# Altium PCB MCH_CLKB_PCB.PcbDoc (part 4 of 5)
Units mil, origin at the board's own origin, x right, y up, seen from the top; angles counter-clockwise.
Board outline 7110.67 x 2894.12 mil, 6 copper layers (Top Layer, GND, MidLayer1, MidLayer2, InternalPlane1, Bottom Layer), stack 61.549 mil thick; 421 components, 433 nets, 2112 pads, 1311 vias.
Unrouted connection lines stored in the file: 39.
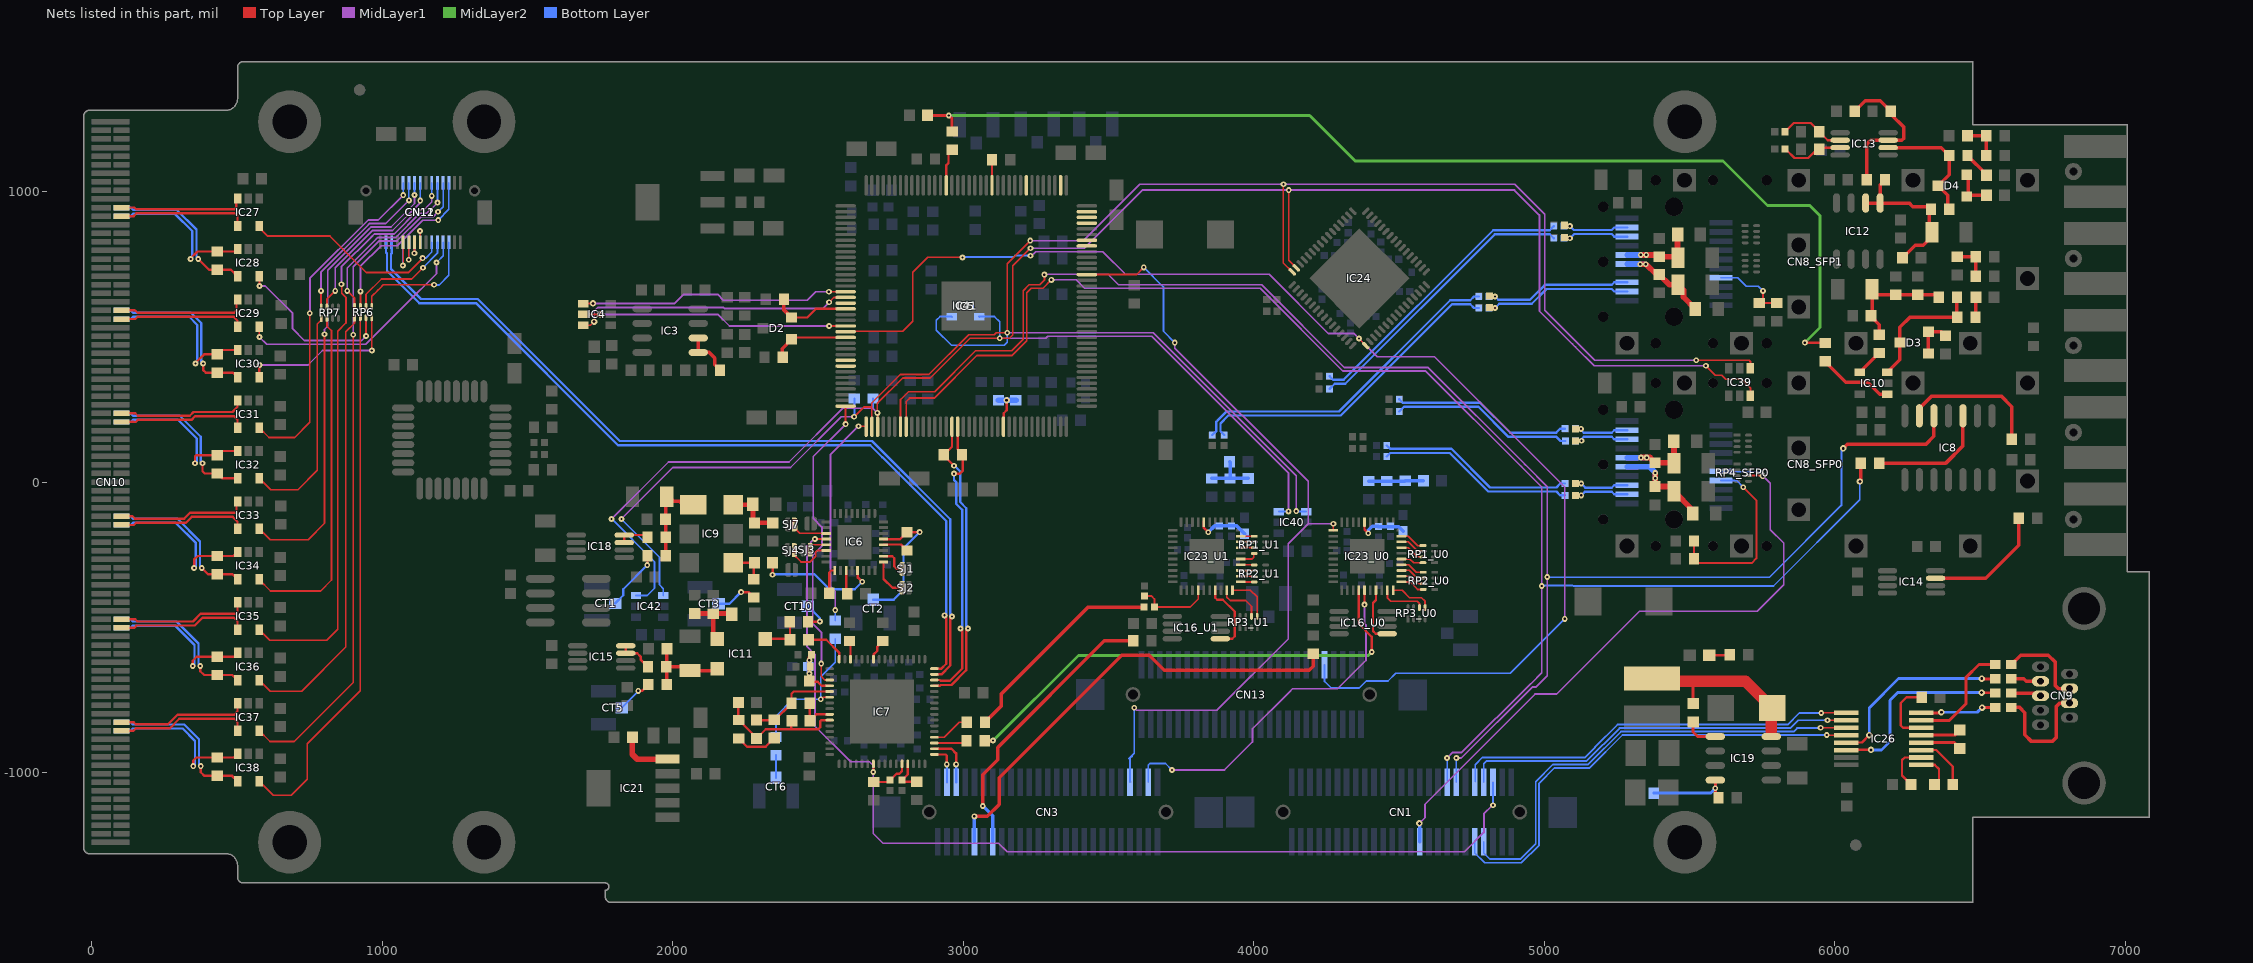
[diagram p8: the nets of this part, all layers, seen from the top]

## Via types
v1: diameter 20, hole 8, Top Layer to Bottom Layer, tented both sides, 842 vias
v2: diameter 22, hole 10, Top Layer to Bottom Layer, tented both sides, 199 vias
v3: diameter 24, hole 12, Top Layer to Bottom Layer, tented both sides, 163 vias
v4: diameter 25.98, hole 12.99, Top Layer to Bottom Layer, tented both sides, 58 vias
v5: diameter 20, hole 10, Top Layer to Bottom Layer, tented both sides, 18 vias
v6: diameter 20, hole 10, Top Layer to Bottom Layer, 16 vias
v7: diameter 28, hole 10, Top Layer to Bottom Layer, tented both sides, 15 vias

## Nets (pads, with @x,y where several pads share a name; then routed paths per layer and width w, separated by ;. In a path a pad name is that pad's centre, name@x,y a point inside that pad or via, vN(x,y) a via of type N, cw(c..) or ccw(c..) an arc to the next point about the centre after c; other vN are vias at no path point) (continued)
NetC55_2: C55.2 C56.2 R25.1 R27.2 R28.2 R29.2 | length 380.3
  Top Layer w12: C55.2@6128.56,664 6128.56,566.94 6153.5,542 R29.2@6153.5,507.5 ; C55.2@6148.05,644.5 R25.1@6209.5,644.5 R27.2@6285.5,644.5 6349.5,644.5 R28.2@6358,636
NetC60_2: C60.2 R31.1 | length 67
  Top Layer w12: R31.1@6486,569.01 C60.2@6486,636
NetC62_1: C62.1 R33.1 R34.1 | length 131
  Top Layer w12: C62.1@6421.5,775.5 6485.5,775.5 R34.1@6485.5,708.5
NetC64_2: C64.2 D3.1 D3.2 | length 139.4
  Top Layer w12: D3.1@6322.71,442.6 D3.2@6322.71,517.4 6367.59,517.4 C64.2@6381.5,503.5
NetC75_2: C75.2 C76.1 IC12.1 IC12.2 R37.2 R38.2 | length 525.5
  Top Layer w12: IC12.2@6106.5,960.46 IC12.1@6156.5,960.46 ; R37.2@6173,1035.72 R37.2@6173,1040 6156.5,1023.5 IC12.1@6156.5,960.46 ; C76.1@6234,772 6234.61,772 6277.61,815 6304.5,815 C75.2@6334.44,844.94 ; C75.2@6326,868.44 6326,948 6268.5,948 6256.04,960.46 IC12.1@6156.5,960.46
NetC78_2: C78.2 R40.1 | length 94.9
  Top Layer w12: R40.1@6457,1124 6522,1058.99 C78.2@6522,1056
NetC81_1: C81.1 IC13.3 R37.1 R39.1 | length 525.2
  Top Layer w12: C81.1@6069,1276 6105,1312 6157,1312 R39.1@6193,1276 6193,1266.5 6238.5,1221 6238.5,1184 6231.3,1176.8 IC13.3@6184.18,1176.8 6123.3,1176.8 6110,1163.5 R37.1@6110,1040
NetC82_1: C82.1 R41.1 R42.1 | length 133
  Top Layer w12: C82.1@6457,1192 R41.1@6522,1192 R42.1@6522,1124
NetC84_1: C84.1 D4.1 D4.2 | length 133.5
  Top Layer w12: D4.2@6454.71,1057.4 6460.11,1052 6460.11,988 C84.1@6522,988
NetC85_2: C85.2 C87.2 IC11.4 L6.1 | length 226.8
  Top Layer w8: C85.2@2138.5,-452.5 C85.2@2139.5,-453.5 C85.2@2139.5,-455 ; L6.1@2201.63,-453.5 L6.1@2203.13,-455
  Top Layer w16: C87.2@2076.5,-452.5 2200.63,-452.5 L6.1@2203.13,-455 ; C85.2@2139.5,-455 2139.5,-526.64 IC11.4@2152.88,-540.02
  Top Layer w26: C87.2@2076.5,-452.5 C87.2@2079,-455
NetC89_2: C89.2 C92.2 C95.2 IC7.4 L15.1 | length 218.4
  Top Layer w8: C95.2@2470,-685 2473,-688 2499.08,-688 2512.5,-701.42 IC7.4@2540.38,-701.42
  Top Layer w12: C95.2@2470,-685 2470,-603.13 C92.2@2478.12,-595
  Bottom Layer w12: v1(2470.5,-659) 2467.06,-655.56 L15.1@2467.06,-635 2467.06,-617.44 v1(2470.5,-614)
NetC90_2: C90.2 C91.2 IC11.1 R45.2 R51.1 | length 310
  Top Layer w12: C90.2@1977.5,-576.5 C90.2@1980,-574 R45.2@1980,-636 ; R45.2@1978,-636 R45.2@1980,-636 ; R51.1@1979,-697 1980,-696 R45.2@1980,-636 ; IC11.1@2152.88,-642.38 2146.2,-649.06 C91.2@2059.5,-649.06 2046.44,-636 R45.2@1980,-636
NetC96_2: C96.2 C99.2 IC9.6 L5.1 | length 205.8
  Top Layer w8: L5.1@2276.13,-76 L5.1@2281.5,-81.37
  Top Layer w16: IC9.6@2208.5,-78 2274.13,-78 L5.1@2276.13,-76 2276.13,-135.13 C96.2@2281.5,-140.5 C99.2@2344.5,-140.5
NetC97_1: C97.1 IC6.19 | length 81
  Top Layer w8: IC6.19@2597.83,-304.6 2597.5,-304.93 2597.5,-380.5 C97.1@2601,-384
NetC100_1: C100.1 IC9.4 R48.2 | length 129.6
  Top Layer w8: IC9.4@2208.5,-278 C100.1@2281,-278 2279.5,-279.5 R48.2@2279.5,-334.5
NetC100_2: C100.2 IC6.21 | length 428.7
  Top Layer w8: v1(2343.5,-319) 2344,-318.5 C100.2@2344,-278 ; IC6.21@2637.2,-304.6 2637.5,-304.9 2637.5,-329 2651.5,-343 v1(2652.5,-343)
  Bottom Layer w8: v1(2343.5,-319) 2345.5,-317 2417.5,-317 2441.5,-317 2487.5,-317 2539.5,-369 2626.5,-369 v1(2652.5,-343)
NetC101_2: C101.2 C124.2 IC9.1 R17.1 R52.2 | length 357.2
  Top Layer w12: R17.1@1976,-253 R52.2@1976,-190 1976,-53.56 C101.2@1979.56,-50 1987.5,-50 2003.5,-66 2058.5,-66 IC9.1@2070.5,-78 2034.5,-78 IC9.1@2024.5,-68
NetC102_1: C102.1 IC6.17 | length 93.8
  Top Layer w8: C102.1@2539,-383 2539,-311.5 2545.9,-304.6 IC6.17@2558.46,-304.6
NetC103_1: C103.1 IC7.64 | length 146.9
  Top Layer w8: C103.1@2467,-543 2528.8,-543 2572.86,-587.06 IC7.64@2572.86,-609.88
NetC103_2: C103.2 IC11.3 R59.1 | length 149.4
  Top Layer w8: IC11.3@2318.23,-540.02 2401.02,-540.02 C103.2@2404,-543 2404,-482 R59.1@2403,-481
NetC104_1: C104.1 IC13.7 R60.1 | length 214.2
  Top Layer w8: C104.1@5833.22,1146 5833.22,1144.24 5862.15,1115.31 5909.1,1115.31 5938.78,1145 R60.1@5947,1145 5953.2,1151.2 IC13.7@6018.82,1151.2
NetC105_1: C105.1 IC13.6 R61.2 | length 226.3
  Top Layer w8: C105.1@5829.22,1206 5858.9,1235.69 5917.31,1235.69 R61.2@5947,1206 5976.2,1176.8 IC13.6@6018.82,1176.8
NetC110_1: C110.1 D6.2 IC19.8 L16.1 | length 581.6
  Top Layer w10: C110.1@5512.5,-762.5 5512.5,-686
  Top Layer w20: 5781.5,-857 5781.96,-857.46 IC19.8@5781.96,-876
  Top Layer w40: L16.1@5421.5,-695 5430.5,-686 5693.08,-686 D6.2@5785.08,-778 5781.5,-781.58 5781.5,-857
NetC110_2: C110.2 IC19.1 | length 117.7
  Top Layer w10: C110.2@5512.5,-825.5 5512.5,-860 5528.5,-876 IC19.1@5589.04,-876
NetC117_SFP0_1: C117_SFP0.1 C118_SFP0.1 CN8_SFP0.15 L9_SFP0.1 | length 346.8
  Top Layer w20: v1(5382.5,31) 5382.5,-14.5 C118_SFP0.1@5381.5,-15.5 5429.95,-15.5 C117_SFP0.1@5446.44,-32 5512.13,-97.68 L9_SFP0.1@5512.13,-108
  Bottom Layer w20: CN8_SFP0.15@5285.65,52.42 5363.08,52.42 5382.5,33 v1(5382.5,31) v1(5382.5,13)
NetC117_SFP1_1: C117_SFP1.1 C118_SFP1.1 CN8_SFP1.15 L9_SFP1.1 | length 330.5
  Top Layer w20: v1(5330.5,750) v1(5349.5,750) 5350.79,750 5386.3,714.5 C118_SFP1.1@5395.5,714.5 5431,679 C117_SFP1.1@5460.44,679 5479.47,659.97 5479.47,636.66 L9_SFP1.1@5520.13,596
  Bottom Layer w20: CN8_SFP1.15@5285.65,750.42 v1@5330.08,750.42 ; v1(5330.5,750) v1(5349.5,750)
NetC120_SFP0_2: C120_SFP0.2 C121_SFP0.2 CN8_SFP0.16 L8_SFP0.1 | length 331.1
  Top Layer w20: v1(5333.5,84) 5364,84 C121_SFP0.2@5381.5,66.5 5443.94,66.5 C120_SFP0.2@5446.44,64 5446.44,139.68 L8_SFP0.1@5446.13,140
  Bottom Layer w12: CN8_SFP0.16@5285.65,83.91 5333.41,83.91 v1(5333.5,84) v1(5352.5,84)
  Bottom Layer w20: CN8_SFP0.16@5285.65,83.91 5352.41,83.91 v1(5352.5,84)
NetC120_SFP1_2: C120_SFP1.2 C121_SFP1.2 CN8_SFP1.16 L8_SFP1.1 | length 273.4
  Top Layer w20: v1(5332.5,782) v1(5351.5,782) 5389,782 C121_SFP1.2@5395.5,775.5 C120_SFP1.2@5456.94,775.5 ; L8_SFP1.1@5459.13,852 5459.13,773.32 C120_SFP1.2@5460.44,772
  Bottom Layer w20: CN8_SFP1.16@5285.65,781.91 v1@5332.41,781.91 ; v1(5332.5,782) v1(5351.5,782)
NetC126_2: C126.2 IC21.5 | length 185.8
  Top Layer w20: C126.2@1861,-879 1861,-937.5 1877.5,-954 IC21.5@1981.5,-954
NetC127_1: C127.1 C161.1 C162.2 IC7.10 R66.1 | length 478.9
  Top Layer w8: C162.2@2226,-759 2226,-818.01 R66.1@2227.5,-819.5 2288.5,-880.5 C127.1@2288.5,-882.5 2320,-851 2407.5,-851 ; C161.1@2410,-821 2407.5,-823.5 2407.5,-851 ; 2439.69,-850.69 2448.5,-850.69 ; IC7.10@2540.38,-819.53 2511.97,-819.53 2507.5,-824 2507.5,-844 2500.81,-850.69 2448.5,-850.69 ; 2407.5,-851 2448.19,-851 2448.5,-850.69
NetC127_2: C127.2 C160.2 IC7.5 R67.2 | length 312.3
  Top Layer w8: C127.2@2288.5,-819.5 2351.5,-819.5 R67.2@2409,-762 2409,-728.5 2416.4,-721.1 IC7.5@2540.38,-721.1
NetC134_U0_2: C134_U0.2 C135_U0.2 R53_U0.1 R54_U0.1 | length 191.2
  Bottom Layer w8: R54_U0.1@4457,4.99 R54_U0.1@4458.5,3.5
  Bottom Layer w12: R53_U0.1@4395.5,3.5 R54_U0.1@4458.5,3.5 4520.5,3.5 C134_U0.2@4521.5,4.5 4583.51,4.5 C135_U0.2@4584,4
NetC134_U1_2: C134_U1.2 C135_U1.2 R53_U1.1 R54_U1.1 | length 183.1
  Bottom Layer w12: R53_U1.1@3855.5,12.5 R54_U1.1@3918.5,12.5 ; C135_U1.2@3917,70 3918.5,68.5 R54_U1.1@3918.5,12.5 ; C134_U1.2@3980.5,12.5 R54_U1.1@3918.5,12.5
NetC137_1: C137.1 IC26.2 | length 166.7
  Top Layer w8: C137.1@6262.64,-1041.19 6231.87,-1010.42 6231.87,-957.2 6240.9,-948.17 IC26.2@6298.08,-948.17
NetC138_1: C138.1 IC26.3 | length 193.8
  Top Layer w8: IC26.3@6298.08,-922.58 6349.72,-922.58 6406.64,-979.5 C138.1@6406.64,-1041.19
NetC138_2: C138.2 IC26.1 | length 126.5
  Top Layer w8: IC26.1@6298.08,-973.76 6344.72,-973.76 6359.15,-988.18 6359.15,-1025.7 C138.2@6343.65,-1041.19
NetC139_1: C139.1 IC26.6 | length 231.4
  Top Layer w8: IC26.6@6298.08,-845.81 6235.34,-845.81 6226.95,-837.41 6226.95,-761.83 6247.59,-741.19 C139.1@6299.65,-741.19
NetC140_1: C140.1 IC26.5 | length 140.4
  Top Layer w10: IC26.5@6298.08,-871.4 6413.44,-871.4 C140.1@6431.15,-853.7
NetC140_2: C140.2 IC26.4 | length 155.7
  Top Layer w8: C140.2@6416.15,-921.69 C140.2@6416.15,-907.19
  Top Layer w10: IC26.4@6298.08,-896.99 6411.44,-896.99 C140.2@6431.15,-916.69
NetC159_U0_2: C159_U0.2 C163_U0.2 IC23_U0.36 L10_U0.1 | length 186.1
  Top Layer w8: IC23_U0.36@4381.52,-138.02 4381.52,-163.02 v1(4394.5,-176)
  Bottom Layer w12: v1(4394.5,-176) 4394.5,-166 4408.5,-152 4428.22,-152 C159_U0.2@4429.5,-153.28 4498.97,-153.28 L10_U0.1@4514.5,-168.81
NetC159_U1_2: C159_U1.2 C163_U1.2 IC23_U1.36 L10_U1.1 | length 186.2
  Top Layer w8: IC23_U1.36@3828.52,-138.02 3828.52,-158.02 v1(3843.5,-173)
  Bottom Layer w12: v1(3843.5,-173) 3865.22,-151.28 C159_U1.2@3881.5,-151.28 C163_U1.2@3923.5,-151.28 3941.97,-151.28 L10_U1.1@3968.5,-177.81
NetC160_1: C160.1 R66.2 | length 146.2
  Top Layer w8: R66.2@2227.5,-882.5 2256.2,-911.2 2319.8,-911.2 C160.1@2349.5,-881.5
NetC161_2: C161.2 IC7.9 R67.1 | length 135.6
  Top Layer w8: R67.1@2472,-762 2472,-820 C161.2@2473,-821 2494.15,-799.84 IC7.9@2540.38,-799.84
NetC165_1: C165.1 IC7.29 R83.1 | length 117.4
  Top Layer w8: IC7.29@2809.08,-970.12 2809.08,-1006.7 C165.1@2789.5,-1026.28 2794.72,-1031.5 R83.1@2840.5,-1031.5
NetC166_1: C166.1 IC7.28 R84.2 | length 137.4
  Top Layer w8: R84.2@2692.5,-1032.5 2742.28,-1032.5 C166.1@2748.5,-1026.28 2770.7,-1004.08 2780.42,-1004.08 2789.4,-995.1 IC7.28@2789.4,-970.12
NetCN3_10: CN3.10 R57.1 | length 1618.4
  Top Layer w12: v1(3038.5,-1151) 3082.5,-1151 3123.5,-1110 3123.5,-1082 ; 3123.5,-1070.89 3123.5,-1082 ; R57.1@4204.5,-591.5 4204.5,-634 4190.5,-648 3692.5,-648 3640.5,-596 3592.61,-596 3545.5,-596 3123.5,-1018 3123.5,-1082
  Bottom Layer w12: v1(3038.5,-1151) 3038.64,-1151.14 CN3.10@3038.64,-1238.58
NetCN3_14: CN3.14 R58.1 | length 978.4
  Top Layer w12: v1(3067.5,-1115) 3067.5,-1007 3118.5,-956 3118.5,-914 3485.5,-547 R58.1@3585,-547
  Bottom Layer w12: v1(3067.5,-1115) 3101.63,-1149.13 CN3.14@3101.63,-1238.58
NetCN8_SFP0_7: CN8_SFP0.7 R70_SFP0.2 R71_SFP0.2 | length 638.6
  Top Layer w6: R71_SFP0.2@5516,-203 R70_SFP0.2@5516,-264 5531,-279 5714.5,-279 5730.5,-263 5730.5,-152.97 5730.5,-63 5718.5,-51 v1(5685.5,-18)
  Bottom Layer w6: CN8_SFP0.7@5608.48,5.17 5662.33,5.17 v1(5685.5,-18)
NetCN8_SFP1_7: CN8_SFP1.7 R70_SFP1.2 R71_SFP1.2 | length 270.6
  Top Layer w6: v1(5753.5,658) 5753.5,629.5 R70_SFP1.2@5740.5,616.5 R71_SFP1.2@5800.5,616.5
  Bottom Layer w6: CN8_SFP1.7@5608.48,703.17 5666.2,703.17 5695.37,674 5737.5,674 v1(5753.5,658)
NetCN9_2: CN9.2 L13.1 | length 104.2
  Top Layer w12: L13.1@6608.06,-677.33 6650.83,-677.33 6659.33,-685.83 CN9.2@6708.72,-685.83
NetCN9_3: CN9.3 L11.1 | length 104.5
  Top Layer w12: L11.1@6608.06,-726.67 6699.56,-726.67 CN9.3@6708.72,-735.83
NetCN9_7: CN9.7 L12.1 | length 308.9
  Top Layer w12: L12.1@6608.06,-628 6640.06,-596 6735.5,-596 6758.5,-619 6758.5,-700 6769.33,-710.83 CN9.7@6808.72,-710.83
NetCN9_8: CN9.8 L14.1 | length 410.5
  Top Layer w12: L14.1@6608.06,-776 6636.5,-776 6654.5,-794 6654.5,-870 6677.5,-893 6748.5,-893 6763.5,-878 6763.5,-772 6774.67,-760.83 6804.88,-760.83 CN9.8@6808.72,-760.83
NetCN11_5: CN11.5 RP6.7 | length 614.8
  Top Layer w6: RP6.7@924.98,605 v1(924.98,656.3)
  MidLayer1 w6: v1(924.98,656.3) 924.98,742.25 996.23,813.5 1051.4,813.5 1139.5,901.6 1147.8,901.6 v1(1192.6,901.6)
  Bottom Layer w6: v1(1192.6,901.6) 1229.43,938.43 CN11.5@1229.43,1030.26
NetCN11_6: CN11.6 RP6.5 | length 463.4
  Top Layer w6: 964.03,617 RP6.5@964.03,604.69 964.03,639.53 985.75,661.25 ; 981.3,656.8 985.75,661.25 ; v1(1178.6,679) 1003.5,679 999.1,674.6 985.75,661.25
  Bottom Layer w6: v1(1178.6,679) 1179.4,678.2 1196.2,678.2 1229.43,711.43 CN11.6@1229.43,825.54
NetCN11_9: CN11.9 RP6.8 | length 624.6
  Top Layer w6: v1(879.5,658) 904.97,632.53 RP6.8@904.97,604.69
  MidLayer1 w6: v1(879.5,658) 879.5,737 973.85,831.35 ; 980.5,838 973.85,831.35 ; v1(1190.2,961.9) 1153.9,925.6 1149.9,925.6 1148.9,925.6 1129.56,925.6 1045.96,842 984.5,842 973.85,831.35
  Bottom Layer w6: CN11.9@1190.06,1030.26 1190.2,1030.12 v1(1190.2,961.9)
NetCN11_10: CN11.10 RP6.6 | length 383.6
  Top Layer w6: RP6.6@944.34,604.69 944.34,645.84 997.3,698.8 1101.4,698.8 v1(1140.3,737.7)
  Bottom Layer w6: v1(1140.3,737.7) 1140.3,738.1 1190.06,787.86 CN11.10@1190.06,825.54
NetCN11_15: CN11.15 RP7.7 | length 605.2
  Top Layer w6: RP7.7@809.66,602.69 809.66,629.16 v1(838.5,658)
  MidLayer1 w6: v1(838.5,658) 838.5,738 963.5,863 ; v1(1130.8,968.7) 1130.8,961.53 1035.27,866 966.5,866 ; 963.5,863 966.5,866 ; 963.5,863 966.5,866
  Bottom Layer w6: v1(1130.8,968.7) 1131,968.9 CN11.15@1131,1030.26
NetCN11_19: CN11.19 RP7.8 | length 592.4
  Top Layer w6: RP7.8@788.97,603.69 v1(788.97,658) v1@788.97,660
  MidLayer1 w6: v1(788.97,658) 788.97,722.41 952.73,886.17 ; v1(1092,969.5) 1012.5,890 956.56,890 ; 952.73,886.17 956.56,890 ; 952.73,886.17 956.56,890
  Bottom Layer w6: CN11.19@1091.63,1030.26 1091.63,969.87 v1(1092,969.5)
NetCT1_1: CT1.1 R17.2 | length 213.4
  Top Layer w8: v1@1913,-285.5 R17.2@1913,-253
  Bottom Layer w8: CT1.1@1801.49,-418.09 1829.5,-390.08 1829.5,-369 v1(1912.5,-286) v1@1910.5,-284
NetCT2_1: CT2.1 IC6.29 R44.2 | length 475.1
  Top Layer w8: IC6.29@2725.78,-196.33 2726.45,-197 2782,-197 R44.2@2806.5,-172.5 v1(2850,-172.5)
  Bottom Layer w8: CT2.1@2689.59,-405.01 2760.49,-405.01 2794.5,-371 2794.5,-228.01 v1(2850,-172.5)
NetCT3_1: CT3.1 R48.1 | length 146.2
  Top Layer w8: v1(2235.5,-379) 2261,-379 R48.1@2279.5,-397.5
  Bottom Layer w8: CT3.1@2157.49,-418.95 2195.55,-418.95 v1(2235.5,-379)
NetCT5_1: CT5.1 R51.2 | length 129.4
  Top Layer w8: v1@1884.5,-722 v1(1881.5,-719) 1894,-719 R51.2@1916,-697
  Bottom Layer w8: CT5.1@1824.49,-776.95 1881.5,-719.94 v1(1881.5,-719)
NetCT6_1: CT6.1 R95.2 | length 77.5
  Bottom Layer w8: R95.2@2355.5,-940.5 2355.5,-1017.92 CT6.1@2355.59,-1018.01
NetCT10_1: CT10.1 R59.2 | length 111
  Top Layer w8: R59.2@2466,-481 2505.5,-481 v1(2506.5,-480)
  Bottom Layer w8: CT10.1@2465.49,-426.95 2506.5,-467.95 v1(2506.5,-480)
NetD3_3: D3.3 IC10.3 R28.1 R31.2 | length 452.7
  Top Layer w12: IC10.3@6180.74,377.4 6224.29,420.94 D3.3@6224.29,480 6224.29,532.79 6259.5,568 R31.2@6422,568 ; R31.2@6421,569.01 R28.1@6421,636
NetD4_3: D4.3 IC13.2 R38.1 R40.2 | length 426.3
  Top Layer w12: IC13.2@6184.18,1151.2 6366.8,1151.2 R40.2@6394,1124 6394,1057.72 D4.3@6356.29,1020 6389,987.29 R38.1@6389,948
NetD5_2: D5.2 R56.2 | length 71.5
  Top Layer w8: D5.2@5567.96,-596 5638,-596 R56.2@5639,-595
NetIC3_1: IC3.1 IC3.2 R10.1 | length 164.1
  Top Layer w12: IC3.2@2087.96,496 IC3.1@2087.96,446 2125.5,446 2144.5,427 2144.5,403.5 R10.1@2163,385
NetIC5_14: IC5.14 R22.2 | length 86.7
  Top Layer w6: R22.2@3099,1109 3099.08,1108.92 IC5.14@3099.08,1022.35
NetIC5_22: IC5.22 R3.2 | length 129.8
  Top Layer w6: IC5.22@2941.5,1022.46 IC5.22@2941.6,1022.35
  Top Layer w8: IC5.22@2941.6,1022.35 2941.5,1022.46 2941.5,1090 2949.5,1098 2949.5,1105 2949.5,1131 R3.2@2962,1143.5
NetIC5_97: IC5.97 R20.2 R21.2 | length 154
  Top Layer w8: IC5.97@3139.45,191.65 3139.45,236.95 3149.5,247 v2(3149.5,281.5)
  Bottom Layer w20: R21.2@3121.5,281.5 v2(3149.5,281.5) R20.2@3181.5,281.5
NetIC6_11: IC6.11 SJ7.2 | length 129
  Top Layer w6: SJ7.2@2421.28,-146 2421.28,-160.78 2437.15,-176.65 IC6.11@2528.93,-176.65
NetIC6_13: IC6.13 SJ3.2 | length 74.5
  Top Layer w6: SJ3.2@2476.28,-238 2476.28,-216.22 2476.5,-216 IC6.13@2528.93,-216.02
NetIC6_14: IC6.14 SJ4.2 | length 156.5
  Top Layer w6: SJ4.2@2424.28,-238 2424.28,-257.78 2441.5,-275 2472.89,-275 2492.7,-255.19 2492.7,-240.45 2497.45,-235.7 IC6.14@2528.43,-235.7 IC6.14@2528.93,-235.7
NetIC6_25: IC6.25 SJ2.2 | length 132.9
  Top Layer w8: IC6.25@2725.78,-275.07 2725.78,-302.06 2725.78,-333.28 2756.5,-364 SJ2.2@2787.72,-364
NetIC6_26: IC6.26 SJ1.2 | length 104.6
  Top Layer w8: IC6.26@2725.78,-255.39 2755.89,-255.39 2762.5,-262 2762.5,-267 ; 2762.5,-273.78 2762.5,-267 ; SJ1.2@2788.72,-300 2786.72,-298 2770.5,-298 2762.5,-290 2762.5,-267
NetIC6_28: IC6.28 R44.1 | length 89.6
  Top Layer w8: IC6.28@2725.78,-216.02 2726.8,-215 2786,-215 R44.1@2806.5,-235.5
NetIC7_6: IC7.6 R65.1 R95.1 | length 512.6
  Top Layer w6: v1(2509.5,-748) 2510.5,-748 2517.71,-740.79 IC7.6@2540.38,-740.79
  Bottom Layer w6: R95.1@2355.5,-877.5 2355.5,-806 2413.5,-748 v1(2509.5,-748) 2509.5,-670 2559.5,-620 R65.1@2559.5,-539.5
NetIC7_35: IC7.35 R36.1 | length 113.4
  Top Layer w6: IC7.35@2900.62,-898.27 3003.74,-898.27 R36.1@3011,-891
NetIC7_36: IC7.36 R43.1 | length 132.8
  Top Layer w6: IC7.36@2900.62,-878.58 2934.79,-878.58 2986.37,-827 R43.1@3012,-827
NetIC7_58: IC7.58 R63.2 | length 75.9
  Top Layer w8: IC7.58@2690.97,-609.88 2691.5,-609.35 2691.5,-594 2704.5,-581 2704.5,-566.5 R63.2@2723.5,-547.5
NetIC7_62: IC7.62 R50.2 | length 63.9
  Top Layer w8: R50.2@2608.5,-547.5 2612.23,-551.23 IC7.62@2612.23,-609.88
NetIC8_3: IC8.3 R26.1 | length 417.4
  Top Layer w12: R26.1@6153,64 6381.5,64 6441.5,124 IC8.3@6441.5,228
NetIC8_6: IC8.6 R32.2 | length 487.9
  Top Layer w12: IC8.6@6291.5,228 6291.5,253 6334.5,296 6573.5,296 6610,259.5 R32.2@6610,148
NetIC10_1: IC10.1 R35.1 | length 251.5
  Top Layer w12: R35.1@5973.26,408.76 6038.03,344 6113.5,344 6154.9,302.6 IC10.1@6180.74,302.6
NetIC10_4: IC10.4 R29.1 | length 95
  Top Layer w12: IC10.4@6086.26,377.4 6086.4,377.4 R29.1@6153.5,444.5
NetIC14_7: IC14.7 R46.2 | length 427.4
  Top Layer w12: IC14.7@6347.18,-331.2 6520.3,-331.2 6634,-217.5 R46.2@6634,-124
NetIC15_3: IC15.3 IC15.4 R45.1 | length 127.4
  Top Layer w8: IC15.4@1838.18,-563.61 IC15.3@1838.18,-589.2 1877.7,-589.2 1889.5,-601 1889.5,-610.5 R45.1@1915,-636
NetIC16_U0_1: IC16_U0.1 IC23_U0.17 | length 198.5
  Top Layer w6: IC23_U0.17@4420.89,-372.27 IC23_U0.17@4421.5,-372.88
  Top Layer w8: IC23_U0.17@4420.89,-372.27 4420.89,-405.61 4410.5,-416 4410.5,-513 4419.89,-522.39 IC16_U0.1@4459.18,-522.39
NetIC16_U1_1: IC16_U1.1 IC23_U1.17 | length 250
  Top Layer w8: IC23_U1.17@3867.89,-372.27 3867.89,-398 3874.89,-405 3893.5,-405 3934.5,-446 3934.5,-531 3926.11,-539.39 IC16_U1.1@3885.18,-539.39
NetIC18_3: IC18.3 IC18.4 R52.1 | length 108.5
  Top Layer w8: IC18.3@1833.18,-208.2 IC18.4@1833.18,-182.61 1905.62,-182.61 R52.1@1913,-190
NetIC19_4: IC19.4 R62.1 R64.2 | length 284.6
  Top Layer w10: IC19.4@5589.04,-1026 v1(5589.04,-1054) 5589.04,-1076.04 R64.2@5600,-1087
  Bottom Layer w10: R62.1@5377,-1071 5572.04,-1071 v1(5589.04,-1054)
NetIC23_U0_19: IC23_U0.19 RP3_U0.6 | length 160
  Top Layer w6: IC23_U0.19@4459.5,-373.02 IC23_U0.19@4460.26,-372.27 4460.26,-398.76 4471.5,-410 4562.5,-410 4570.34,-417.84 RP3_U0.6@4570.34,-432.31
NetIC23_U0_20: IC23_U0.20 RP3_U0.5 | length 147.7
  Top Layer w6: IC23_U0.20@4479.94,-372.27 4510.77,-372.27 4536.5,-398 4577.5,-398 4590.03,-410.53 RP3_U0.5@4590.03,-432.31
NetIC23_U0_21: IC23_U0.21 RP2_U0.8 | length 86
  Top Layer w6: IC23_U0.21@4508.48,-343.72 4538.22,-343.72 4564.03,-369.53 RP2_U0.8@4583.81,-369.53
NetIC23_U0_22: IC23_U0.22 RP2_U0.7 | length 86
  Top Layer w5: IC23_U0.22@4508.48,-324.04 4536.54,-324.04 4556.08,-343.58 4562.34,-349.84 RP2_U0.7@4583.81,-349.84
NetIC23_U0_23: IC23_U0.23 RP2_U0.6 | length 86
  Top Layer w5: IC23_U0.23@4508.48,-304.35 4534.85,-304.35 4560.66,-330.16 RP2_U0.6@4583.81,-330.16
NetIC23_U0_24: IC23_U0.24 RP2_U0.5 | length 86
  Top Layer w5: IC23_U0.24@4508.48,-284.67 4533.17,-284.67 4558.97,-310.47 RP2_U0.5@4583.81,-310.47
NetIC23_U0_25: IC23_U0.25 RP1_U0.8 | length 81.7
  Top Layer w5: IC23_U0.25@4508.48,-264.98 4537.48,-264.98 4548.5,-276 4550.03,-277.53 RP1_U0.8@4582.81,-277.53 RP1_U0.8@4581.29,-276
NetIC23_U0_27: IC23_U0.27 RP1_U0.7 | length 87.7
  Top Layer w5: IC23_U0.27@4508.48,-225.61 4532.11,-225.61 4558.5,-252 4564.34,-257.84 RP1_U0.7@4582.81,-257.84
NetIC23_U0_28: IC23_U0.28 RP1_U0.6 | length 87.7
  Top Layer w5: IC23_U0.28@4508.48,-205.93 4532.43,-205.93 4564.66,-238.16 RP1_U0.6@4582.81,-238.16
NetIC23_U0_29: IC23_U0.29 RP1_U0.5 | length 87.7
  Top Layer w5: IC23_U0.29@4508.48,-186.24 4532.74,-186.24 4564.97,-218.47 RP1_U0.5@4582.81,-218.47
NetIC23_U1_19: IC23_U1.19 RP3_U1.6 | length 156.5
  Top Layer w6: IC23_U1.19@3907.26,-372.27 3907.26,-396 3919.26,-408 3972.5,-408 3992.34,-427.84 RP3_U1.6@3992.34,-462.31
NetIC23_U1_20: IC23_U1.20 RP3_U1.5 | length 161.5
  Top Layer w6: IC23_U1.20@3926.94,-372.27 3988.77,-372.27 4012.03,-395.53 RP3_U1.5@4012.03,-462.31
NetIC23_U1_21: IC23_U1.21 RP2_U1.8 | length 46.7
  Top Layer w6: IC23_U1.21@3955.48,-343.72 4001.01,-343.72 RP2_U1.8@4001.81,-344.53
NetIC23_U1_22: IC23_U1.22 RP2_U1.7 | length 46.7
  Top Layer w6: IC23_U1.22@3955.48,-324.04 4001.01,-324.04 RP2_U1.7@4001.81,-324.84
NetIC23_U1_23: IC23_U1.23 RP2_U1.6 | length 45.5
  Top Layer w6: IC23_U1.23@3955.48,-304.35 RP2_U1.6@4001.01,-304.35
NetIC23_U1_24: IC23_U1.24 RP2_U1.5 | length 45.5
  Top Layer w6: IC23_U1.24@3955.48,-284.67 RP2_U1.5@4001.01,-284.67
NetIC23_U1_25: IC23_U1.25 RP1_U1.8 | length 61.5
  Top Layer w6: IC23_U1.25@3955.48,-264.98 3994.52,-264.98 4000.5,-259 4000.5,-246.84 RP1_U1.8@4001.81,-245.53
NetIC23_U1_27: IC23_U1.27 RP1_U1.7 | length 46.1
  Top Layer w6: IC23_U1.27@3955.48,-225.61 RP1_U1.7@4001.59,-225.61
NetIC23_U1_28: IC23_U1.28 RP1_U1.6 | length 46.1
  Top Layer w6: IC23_U1.28@3955.48,-205.93 RP1_U1.6@4001.59,-205.93
NetIC23_U1_29: IC23_U1.29 RP1_U1.5 | length 46.1
  Top Layer w6: IC23_U1.29@3955.48,-186.24 RP1_U1.5@4001.59,-186.24
NetIC26_7: IC26.7 L12.2 | length 387.4
  Top Layer w10: IC26.7@6298.08,-820.22 6394.76,-820.22 6452.7,-762.28 6452.7,-671.93 6496.63,-628 L12.2@6552.94,-628
NetIC26_8: IC26.8 L14.2 | length 262.6
  Top Layer w10: IC26.8@6298.08,-794.62 6365.17,-794.62 v2(6367.22,-792.58) ; v2(6507.34,-776.35) 6507.69,-776 L14.2@6552.94,-776
  Bottom Layer w10: v2(6367.22,-792.58) 6491.11,-792.58 v2(6507.34,-776.35)
NetIC26_13: IC26.13 L13.2 | length 646.8
  Top Layer w8: IC26.13@6052.06,-896.42 6093.92,-896.42 v2(6119.15,-871.19)
  Top Layer w10: v2(6506.26,-676.8) 6506.8,-677.33 L13.2@6552.94,-677.33
  Bottom Layer w10: v2(6119.15,-871.19) 6119.15,-777.71 6220.06,-676.8 v2(6506.26,-676.8)
NetIC26_14: IC26.14 L11.2 | length 668.1
  Top Layer w8: IC26.14@6052.06,-922.01 6118.33,-922.01 v2@6122.15,-918.19 ; v2(6505.72,-724.95) 6551.22,-724.95 L11.2@6552.94,-726.67
  Bottom Layer w8: v2(6125.15,-922.19) v2@6127.62,-919.72
  Bottom Layer w10: v2(6125.15,-922.19) 6160.77,-922.19 6190.3,-892.67 6190.3,-751.46 6216.81,-724.95 v2(6505.72,-724.95)
NRST: CN13.41 IC5.59 IC24.1 | length 4501.2
  Top Layer w6: IC5.59@2595.15,517.42 2596.73,519 2791.5,519 2826.5,554 2826.5,722 2878.5,774 v1@2996.5,774 ; v1@4362.5,493.21 IC24.1@4385.77,469.94
  MidLayer1 w6: v1@3233.5,777 3249.5,793 3480.5,793 3558.5,715 4053.5,715 4257.5,511 4345.5,511 v1(4362.5,494) 4425.5,431 4622.44,431 5070.5,-17.06 v1(5070.5,-471)
  Bottom Layer w6: v1(2997.5,773) 2999.5,775 3173.5,775 3178.5,780 3230.5,780 v1(3231.5,779) ; CN13.41@4243.76,-629.13 4243.76,-686.26 4266.5,-709 4363.5,-709 4387.5,-685 4462.5,-685 4489.5,-658 4777.5,-658 4883.5,-658 v1(5070.5,-471)
PD0_DOWN: IC5.54
PD0_UP: IC5.64
PD1_DOWN: D2.2 IC5.55 R14.1 | length 272
  Top Layer w8: D2.2@2408.71,566.4 2462.9,566.4 2492.66,596.16 IC5.55@2595.15,596.16
  Top Layer w12: R14.1@2383,629 2383,592.12 D2.2@2408.71,566.4
PD1_UP: D2.1 IC5.60 R8.2 | length 262.4
  Top Layer w8: D2.1@2408.71,491.6 2414.85,497.73 IC5.60@2595.15,497.73
  Top Layer w12: R8.2@2376.5,431.5 2376.5,459.39 D2.1@2408.71,491.6
PDADC0_CS: IC5.143
PDADC0_SCLK: IC5.8
PDADC1_CS: IC4.6 IC5.53 | length 962
  Top Layer w6: IC4.6@1692.26,539.6 1717.1,539.6 v2@1725.5,548 ; v1(2538.5,619) 2555.03,635.53 IC5.53@2595.15,635.53
  MidLayer1 w6: v2(1729.5,552) 1729.5,589 1741.5,601 2174.5,601 2178.5,597 2516.5,597 v1(2538.5,619)
PDADC1_SCLK: IC4.4 IC5.52 | length 936.4
  Top Layer w6: IC4.4@1692.26,614.4 1724.9,614.4 v2(1725.5,615) ; v1(2537.5,655) 2537.71,655.21 IC5.52@2595.15,655.21
  MidLayer1 w6: v2(1725.5,615) 2006.5,615 2037.5,646 2129.5,646 2154.5,646 2174.5,626 2463.5,626 2492.5,655 v1(2537.5,655)
PDADC1_SDO: IC4.5 IC5.58 | length 919.5
  Top Layer w6: IC4.5@1692.26,577 v2(1749.5,577) ; v1(2538.5,537) 2538.6,537.1 IC5.58@2595.15,537.1
  MidLayer1 w6: v2(1749.5,577) 2155.5,577 2195.5,537 v1(2538.5,537)
PLL_RST: CN1.45 IC6.12 IC7.23 | length 3568.9
  Top Layer w6: v1@2486.17,-196.33 v1(2489.5,-196.33) IC6.12@2528.93,-196.33 ; v1(2690.5,-998) 2690.97,-997.53 IC7.23@2690.97,-970.12
  MidLayer1 w6: v1@2485.5,-197 2462.5,-220 2462.5,-567 2489.5,-594 2489.5,-840 2612.5,-963 2677.5,-963 2690.5,-976 v1(2690.5,-998) 2690.5,-1210 2723.9,-1243.4 3121.61,-1243.4 3151.31,-1273.1 4725.6,-1273.1 4792.5,-1206.2 4792.5,-1141.93 4819.26,-1115.17 4822.5,-1115.17 v1@4822.5,-1112
  Bottom Layer w6: v1@4822.5,-1112 4823.68,-1110.82 CN1.45@4823.68,-1033.86
  other v1: 4823.5,-1112.7
PPS_IN_EXT: CN1.35 IC5.80 R26.2 | length 5374.3
  Top Layer w6: IC5.80@2804.5,191.34 IC5.80@2803.81,190.65 2803.81,277.31 2815.5,289 2833.5,289 ; 2819.5,289 2833.5,289 ; v1(3303.5,696) 3274.5,667 3234.5,667 3218.5,651 3218.5,486.25 3168.25,436 3047.5,436 2900.5,289 2833.5,289
  Top Layer w12: v2(6086.5,2) 6090,5.5 R26.2@6090,64
  MidLayer1 w6: v1(3303.5,696) 3388.5,696 3417.5,667 4022.53,667 4307.53,382 4592.5,382 4925.5,49 ; v1(4665.7,-949.8) 4684.7,-930.8 4716.62,-930.8 4953.48,-693.94 4954.56,-693.94 4991.5,-657 v1(4991.5,-358) 4991.5,-17 4925.5,49 ; 4920.5,54 4925.5,49
  Bottom Layer w6: CN1.35@4666.2,-1033.86 v1@4666.2,-954.43 ; v1(4991.5,-358) 4993.5,-356 5098.37,-356 5100.37,-358 5789.5,-358 6086.5,-61 v2(6086.5,2)
PPS_OUT_SYNC: CN1.37 IC5.79 IC8.5 | length 5808.4
  Top Layer w6: IC5.79@2784.12,190.65 2784.5,191.02 2784.5,244 ; 2784.5,237 2784.5,244 ; v1(3279.5,714) 3279.5,695 3263.5,679 3226.5,679 3206.5,659 3206.5,491.22 3167.28,452 3042.5,452 2901.5,311 2811.5,311 2784.5,284 2784.5,244
  Top Layer w12: v2(6029.5,116) 6043.5,130 6314.5,130 6341.5,157 IC8.5@6341.5,228
  MidLayer1 w6: v1(3279.5,714) 3278.5,714 3279.5,715 3498.56,715 3534.56,679 3682.5,679 4027.5,679 4312.5,394 4600.5,394 4936,58.5 ; v1(4697.7,-949.8) 4714.59,-949.8 4958.45,-705.94 4971.56,-705.94 5010.5,-667 v1(5010.5,-327) 5010.5,-16 4936,58.5 ; 4932.5,62 4936,58.5
  Bottom Layer w6: CN1.37@4697.7,-1033.86 v1(4697.7,-949.8) ; v1@5005.5,-328 5775.5,-328 6023.11,-80.39 6023.11,109.61 v2(6029.5,116)
PW0_N: R79.2 R80.1 | length 631.4
  Bottom Layer w8: R79.2@4501.2,285 4513.2,273 4539.5,273 ; 4532.5,273 4539.5,273 ; R80.1@5071.8,184 5055.5,184 5041,169.5 4883,169.5 4779.5,273 4539.5,273
PW0_P: R69.2 R72.1 | length 634.1
  Bottom Layer w8: R69.2@4501.2,243 4517.2,259 4539.5,259 ; 4532.5,259 4539.5,259 ; R72.1@5072.78,141 5056.5,141 5042,155.5 4877.2,155.5 4773.7,259 4539.5,259
PW1_N: R85.2 R86.1 | length 679
  Bottom Layer w8: R85.2@4458.22,88 4470.22,100 4675.2,100 4807.7,-32.5 5042,-32.5 5055.5,-46 R86.1@5071.8,-46
PW1_P: R81.2 R82.1 | length 679
  Bottom Layer w8: R81.2@4458.22,126 4469.22,115 4680,115 4813.5,-18.5 5042,-18.5 5055.5,-5 R82.1@5071.8,-5
PW2_N: R89.2 R90.1 | length 1002.7
  Bottom Layer w8: R89.2@4261.29,364.13 4273.42,352 4284.5,352 ; 4277.5,352 4284.5,352 ; R90.1@5032.8,881 5018.8,867 4824.5,867 4309.5,352 4284.5,352
PW2_P: R87.2 R88.1 | length 998
  Bottom Layer w8: R87.2@4261.29,320.15 4279.14,338 4315.3,338 4830.3,853 5018.8,853 R88.1@5032.8,839
PW3_N: R93.2 R94.1 | length 1110.1
  Bottom Layer w8: R93.2@3898.46,161.79 3885.5,174.75 3885.5,202 3912.5,229 4299.5,229 4682.5,612 4745.5,612 4758.5,599 R94.1@4774.8,599
PW3_P: R91.2 R92.1 | length 1138.8
  Bottom Layer w8: R91.2@3857.27,161.79 3871.5,176.02 3871.5,207.8 3879.1,215.4 ; 3875.6,211.9 3879.1,215.4 ; R92.1@4774.8,639 4758.5,639 4745.5,626 4676.7,626 4293.7,243 3906.7,243 3879.1,215.4
REFCLK_10M: C4.2 R3.1 R35.2 | length 3810.3
  Top Layer w8: v1(5897.5,480) 5966,480 R35.2@5967.5,478.5
  Top Layer w10: C4.2@2877.5,1262 2950.4,1262 v1(2950.5,1261.9) 2962,1250.4 R3.1@2962,1206.5
  MidLayer2 w10: v1(2950.5,1261.9) 2950.6,1261.8 3108.3,1261.8 ; 3102.2,1261.8 3108.3,1261.8 ; v1(5897.5,480) 5949.5,532 5949.5,917 5914.5,952 5768.5,952 5615.5,1105 4349.5,1105 4192.7,1261.8 3108.3,1261.8
REFCLK_EXT_SEL: IC5.2
REFCLK_FAN_N: CN11.26 IC7.47 | length 2982.3
  Top Layer w8: IC7.47@2900.62,-662.05 2924.98,-662.05 2955.5,-631.52 2955.5,-606 ; 2955.5,-621 2955.5,-606 ; v1@2955.5,-462.48 2955.5,-606
  Bottom Layer w8: CN11.26@1031.6,824.56 CN11.26@1032.57,825.54 1032.57,787.17 1031.6,786.2 1030.3,784.9 1030.3,733.2 1133.5,630 1328.5,630 1817.5,141 2685.95,141 2727.37,99.59 ; 2727.71,99.59 2955.5,-128.2 2955.5,-449.72 ; v1(2961.5,-463) v1@2955.7,-463 ; 2955.5,-449.72 2955.5,-463.2 v1@2955.7,-463 ; 2955.5,-449.72 2955.7,-449.92 v1@2955.7,-463
REFCLK_FAN_P: CN11.28 IC7.48 | length 2917.5
  Top Layer w8: IC7.48@2900.62,-642.36 2924.86,-642.36 2941.5,-625.72 v1@2941.5,-465
  Bottom Layer w8: CN11.28@1012.89,825.54 1012.89,790.21 1016.3,786.8 1016.3,727.4 1035.5,708.2 1127.7,616 1322.7,616 1811.7,127 2680.15,127 2721.57,85.59 2721.91,85.59 2941.5,-134 v1@2941.5,-460 ; v1@2934.5,-464 v1@2935.5,-465
  other v1: 2935.5,-459
REFCLK_FB_N: IC5.88 IC7.45 R19.1 | length 1019.2
  Top Layer w8: IC7.45@2900.62,-701.42 2919.5,-701.42 2922.34,-698.57 2959.3,-698.57 3010.5,-647.37 3010.5,-510 v1(3016.5,-504) ; IC5.88@2961.29,191.65 2961.29,121.28 2935,95 2935,89.5 v1(2968.5,56)
  Bottom Layer w8: v1(2968.5,56) 2969.78,56 2989.5,36.28 2989.5,-69 3010.5,-90 3010.5,-498 v1(3016.5,-504)
REFCLK_FB_P: IC5.89 IC7.46 R19.2 | length 995.6
  Top Layer w8: IC7.46@2900.62,-681.73 2919.5,-681.73 2922.34,-684.57 2953.5,-684.57 2996.5,-641.57 2996.5,-510 v1(2990.5,-504) ; v1(2968.5,29) 2988.5,29 2998,38.5 2998,95 2980.97,112.02 IC5.89@2980.97,191.65
  Bottom Layer w8: v1(2968.5,29) 2968.5,7 2975.5,0 2975.5,-74.8 2996.5,-95.8 2996.5,-498 v1(2990.5,-504)
REFCLK_MAIN_N: CN3.5 IC7.34 | length 181.4
  Top Layer w8: IC7.34@2900.62,-917.95 2959.45,-917.95 2975.5,-934 v1(2975.5,-972)
  Bottom Layer w8: v1(2975.5,-972) 2975.5,-982 2975.65,-982.15 CN3.5@2975.65,-1033.86
REFCLK_MAIN_P: CN3.3 IC7.33 | length 137.3
  Top Layer w8: IC7.33@2900.62,-937.64 2939.14,-937.64 2943.5,-942 v1(2943.5,-972)
  Bottom Layer w8: v1(2943.5,-972) 2944.15,-972.65 v1@2944.15,-981.35 ; CN3.3@2944.15,-1033.86 v1@2944.15,-981.35 ; v1@2944.5,-981 v1@2944.15,-981.35
REFCLK_UP0: IC23_U0.14 R36.2 | length 1690.8
  Top Layer w8: IC23_U0.14@4361.83,-372.27 4361.5,-372.6 4361.5,-488 4406.5,-533 v1(4406.5,-585)
  Top Layer w12: R36.2@3074,-891 3101.5,-891 v1(3102.5,-890)
  MidLayer2 w10: v1@3103.5,-890 3396.5,-597 4394.5,-597 v1(4406.5,-585)
  MidLayer2 w12: v1(3102.5,-890) v1@3103.5,-890
REFCLK_UP1: R43.2 R96.1 | length 742.7
  Top Layer w12: R43.2@3075,-827 3131.75,-770.25 3131.75,-728.75 3429.5,-431 3594.5,-431 ; 3600.62,-431 3594.5,-431 ; R96.1@3622.78,-430 3621.78,-431 3594.5,-431
REFPLL_CS: IC5.137
REFPLL_DI: IC5.141
REFPLL_DO: IC5.65
REFPLL_LOCK: IC5.72 IC7.3 | length 1048.9
  Top Layer w6: v1(2511.5,-625) 2511.5,-630.2 2511.5,-669 2524.23,-681.73 IC7.3@2540.38,-681.73 ; v1(2595.15,199.35) IC5.72@2595.15,261.51
  MidLayer1 w6: v1@2510.5,-624.5 2511.8,-623.2 2511.8,-517.3 2482.5,-488 2482.5,-252 2513.5,-221 2513.5,-155 2483.5,-125 2483.5,87.71 v1(2595.15,199.35) v1@2595.5,199
REFPLL_RESET: IC5.142
REFPLL_SCLK: IC5.138
REFPLL_STAT: IC5.73 R65.2 | length 748.8
  Top Layer w6: v1@2635.5,192 v1(2639.5,192) 2664.66,192 IC5.73@2666.01,190.65
  MidLayer1 w6: v1(2559.5,-441) 2559.5,-376.87 2543.5,-360.87 2543.5,96 v1@2637.5,190 ; v1@2635.5,192 v1@2637.5,190 ; v1(2639.5,192) v1@2637.5,190
  Bottom Layer w6: R65.2@2559.5,-476.5 v1(2559.5,-441)
RS_CTS: CN1.41 IC26.9 | length 1424.5
  Top Layer w6: v1@5952.5,-794.62 IC26.9@6040.21,-794.62 ; IC26.9@6040.21,-794.06 IC26.9@6052.06,-794.06
  Bottom Layer w6: CN1.41@4762.5,-1032.05 4762.5,-972.97 4787.47,-948 5141.5,-948 5174.5,-915 5174.5,-913 5252.5,-835 5838.5,-835 5878.5,-795 v1(5953.5,-795)
RS_RTS: CN1.43 IC26.10 | length 1380.8
  Top Layer w6: v1@5968.5,-820.22 IC26.10@6040.21,-820.22
  Bottom Layer w6: CN1.43@4792.19,-1033.86 4792.19,-970.32 4802.5,-960 5146.47,-960 5259.47,-847 5847.5,-847 5874.5,-820 v1(5975.5,-820)
RS_RXD: CN1.42 IC26.12 | length 1639.2
  Top Layer w6: v1(5972.5,-871) 5972.9,-871.4 IC26.12@6040.21,-871.4
  Bottom Layer w6: CN1.42@4760.69,-1238.58 4760.69,-1276.9 4794.79,-1311 4921.5,-1311 4982.5,-1250 4982.5,-1036.97 5035.47,-984 5156.41,-984 5269.41,-871 v1(5972.5,-871)
RS_TXD: CN1.44 IC26.11 | length 1637.2
  Top Layer w6: v1(5951.5,-846) 5951.69,-845.81 IC26.11@6040.21,-845.81
  Bottom Layer w6: CN1.44@4792.19,-1238.58 4792.19,-1276.9 4813.28,-1298 4917.53,-1298 4970.5,-1245.03 4970.5,-1032 5030.5,-972 5151.44,-972 5264.44,-859 5858.5,-859 5870.5,-847 5883.5,-847 ; 5913.5,-847 5883.5,-847 ; v1(5951.5,-846) 5950.5,-847 5883.5,-847
SCL: IC5.74 IC24.48 IC39.1 IC40.1 IC41.1 IC42.1 R16.1 | length 7504
  Top Layer w6: v1(2624.5,225) 2657.5,258 2681.5,258 2685.5,254 ; IC5.74@2685.7,190.65 2685.5,190.84 2685.5,254 ; v1(3230.5,831) 3230.5,830.87 3151.5,751.87 v1(3151.5,514) 3113.5,514 3106.5,507 3018.5,507 2881.5,370 2783.5,370 2685.5,272 2685.5,254 ; v1@4101.5,1024 4101.5,754.21 IC24.48@4132.44,723.27 ; v1(5523.5,419) 5705.5,419 5709.9,414.6 IC39.1@5709.9,391.24
  MidLayer1 w6: v1(1823.5,-127) 2000.5,50 2405.5,50 2580.5,225 v1(2624.5,225) ; v1(3151.5,514) 3654.34,514 4146.5,21.84 v1(4146.5,-100) ; v1(5523.5,419) 5173.5,419 5001.5,591 5001.5,922 4898.5,1025 v1(4102.5,1025) 3607.5,1025 3413.5,831 v1@3231.5,831 ; v1@3231.5,831 3230.5,830 v1(3230.5,831) v1@3231.5,831
  Bottom Layer w6: v1(1823.5,-127) 1823.5,-128 1954.5,-259 1954.5,-354 1967.74,-367.24 IC42.1@1967.74,-390.6 ; v1(2624.5,225) 2625.5,226 R16.1@2625.5,287.5 ; IC41.1@2962.63,567.22 IC41.1@2960.26,569.6 2920.1,569.6 2907.5,557 2907.5,523 2959.5,471 3141.5,471 3151.5,481 v1(3151.5,514) ; v1@4148.1,-101.6 IC40.1@4180.74,-101.6
SDA: IC5.75 IC24.47 IC39.6 IC40.6 IC41.6 IC42.6 R15.1 | length 7339.6
  Top Layer w6: v1(2704.5,238) 2704.5,271 2791.5,358 2886.5,358 3023.5,495 v1(3125.5,495) 3159.37,495 3170.5,506.13 3170.5,744.87 3230.63,805 v1(3231.5,805) ; IC5.75@2705.38,191.65 v1@2705.38,238 ; v1(4120.5,1005) 4120.5,763.05 IC24.47@4146.36,737.19 IC24.47@4135.5,748.05 ; v1(5556.5,400) 5588.78,367.72 5610.78,367.72 5624.5,354 5680.61,354 5709.9,324.71 IC39.6@5709.9,296.76
  MidLayer1 w6: v1(1789.5,-127) 1985.5,69 2400.5,69 2585.5,254 2688.5,254 v1(2704.5,238) ; v1(3125.5,495) 3283.5,495 3290.5,502 3649.37,502 4119.5,31.87 v1(4119.5,-101) ; v1@3232.37,805 3416.5,805 3616.5,1005 v1(4120.5,1005) ; v1@4125.5,1005 4897.5,1005 4983.5,919 4983.5,589 5107.5,465 ; 5097.5,475 5107.5,465 ; v1(5556.5,400) 5172.5,400 5107.5,465
  Bottom Layer w6: v1(1789.5,-127) 1937.5,-275 1937.5,-365 1911.9,-390.6 IC42.6@1873.26,-390.6 ; R15.1@2689.5,287.5 2689.5,253 v1(2704.5,238) ; IC41.6@3057.12,567.22 IC41.6@3054.74,569.6 3107.9,569.6 3125.5,552 v1(3125.5,495) ; IC40.6@4086.26,-101.6 4118.9,-101.6 v1(4119.5,-101)
SFP0_RX_N: C179.2 CN8_SFP0.12 R86.2 | length 187.3
  Bottom Layer w8: R86.2@5107.23,-46 v1(5127.5,-46) 5140.18,-33.32 5232.75,-33.32 5241.5,-42.07 CN8_SFP0.12@5285.65,-42.07
SFP0_RX_P: C177.2 CN8_SFP0.13 R82.2 | length 188
  Bottom Layer w8: R82.2@5107.23,-5 v1(5127.5,-5) 5141.82,-19.32 5232.75,-19.32 5241.5,-10.57 CN8_SFP0.13@5285.65,-10.57
SFP0_TX_N: C172.2 CN8_SFP0.19 R80.2 | length 189.9
  Bottom Layer w8: R80.2@5107.23,184 5125.5,184 v1(5126.5,183) 5126.5,179.65 5136.5,169.65 5232.75,169.65 5241.5,178.4 CN8_SFP0.19@5285.65,178.4
SFP0_TX_P: C170.2 CN8_SFP0.18 R72.2 | length 190.4
  Bottom Layer w8: R72.2@5108.22,141 5127.5,141 v1(5128.5,142) 5128.5,147.65 5136.5,155.65 5232.75,155.65 5241.5,146.91 CN8_SFP0.18@5285.65,146.91
SFP1_RX_N: C181.2 CN8_SFP1.12 R94.2 | length 506.2
  Bottom Layer w8: R94.2@4810.23,599 v1(4830.5,599) 4845.18,613.68 4957.18,613.68 5008.18,664.68 5232.75,664.68 5241.5,655.93 CN8_SFP1.12@5285.65,655.93
SFP1_RX_P: C180.2 CN8_SFP1.13 R92.2 | length 519.5
  Bottom Layer w8: R92.2@4810.23,639 v1(4830.5,639) 4841.82,627.68 ; v1@4831.5,638 4841.82,627.68 ; CN8_SFP1.13@5285.65,687.43 5241.5,687.43 5232.75,678.68 5002.38,678.68 4951.38,627.68 4841.82,627.68
SFP1_TX_N: C174.2 CN8_SFP1.19 R90.2 | length 226.6
  Bottom Layer w8: R90.2@5068.23,881 v1(5088.5,881) 5101.85,867.65 5232.75,867.65 5241.5,876.4 CN8_SFP1.19@5285.65,876.4
SFP1_TX_P: C173.2 CN8_SFP1.18 R88.2 | length 227.1
  Bottom Layer w8: R88.2@5068.23,839 v1(5088.5,839) 5103.15,853.65 5232.75,853.65 5241.5,844.91 CN8_SFP1.18@5285.65,844.91
SMI_RX0: IC38.5 RP6.2 | length 1871.2
  Top Layer w6: IC38.5@583.08,-1036.42 624.55,-1077.89 686.61,-1077.89 741.5,-1023 741.5,-901 924.66,-717.84 RP6.2@924.66,565.32
  Top Layer w8: IC38.5@576.9,-1030.24 IC38.5@583.08,-1036.42
SMI_RX0_N: CN10.156 IC38.4 R78.1 | length 547.1
  Top Layer w8: v1(375.5,-978) 375.5,-999 388,-1011.5 R78.1@432.5,-1011.5 483.35,-1011.5 IC38.4@502.1,-1030.24
  Bottom Layer w8: CN10.156@102.42,-826.77 134.5,-826.77 142.26,-834.54 318.83,-834.54 369.5,-885.2 369.5,-972 v1(375.5,-978)
SMI_RX0_P: CN10.157 IC38.3 R78.2 | length 550.6
  Top Layer w8: v1(349.5,-978) 349.5,-959 360,-948.5 R78.2@432.5,-948.5 489.35,-948.5 IC38.3@502.1,-935.76
  Bottom Layer w8: CN10.157@102.42,-856.3 134.5,-856.3 142.26,-848.54 313.04,-848.54 355.5,-891 355.5,-972 v1(349.5,-978) v1@355.5,-978
SMI_RX1: IC36.5 RP6.1 | length 1522.3
  Top Layer w6: IC36.5@576.9,-682.61 614.49,-720.19 722.5,-720.19 874.7,-567.99 874.7,517.2 904.97,547.47 RP6.1@904.97,565.32
SMI_RX1_N: CN10.144 IC36.4 R77.1 | length 539.2
  Top Layer w8: v1(373.5,-633) 373.5,-651 387,-664.5 R77.1@432.5,-664.5 483.99,-664.5 IC36.4@502.1,-682.61
  Bottom Layer w8: CN10.144@102.42,-472.44 134.5,-472.44 142.26,-480.2 292.3,-480.2 367.5,-555.41 367.5,-627 v1(373.5,-633)
SMI_RX1_P: CN10.145 IC36.3 R77.2 | length 546.1
  Top Layer w8: v1(347.5,-633) 347.5,-615 361,-601.5 R77.2@432.5,-601.5 488.71,-601.5 IC36.3@502.1,-588.12
  Bottom Layer w8: CN10.145@102.42,-501.97 134.5,-501.97 142.26,-494.2 286.5,-494.2 353.5,-561.2 353.5,-627 v1(347.5,-633) v1@353.5,-633
SMI_RX2: IC34.5 RP7.2 | length 1188.8
  Top Layer w6: IC34.5@576.9,-334.97 576.9,-336.4 615.48,-374.98 787.75,-374.98 825.51,-337.22 825.51,521.28 809.66,537.14 RP7.2@809.66,563.32
SMI_RX2_N: CN10.132 IC34.4 R76.1 | length 539.8
  Top Layer w8: v1(378.5,-296) 400,-317.5 R76.1@432.5,-317.5 484.62,-317.5 IC34.4@502.1,-334.97
  Bottom Layer w8: CN10.132@102.42,-118.11 134.5,-118.11 142.26,-125.87 294.17,-125.87 372.5,-204.2 372.5,-290 v1(378.5,-296)
SMI_RX2_P: CN10.133 IC34.3 R76.2 | length 566.4
  Top Layer w8: v1(352.5,-296) 352.5,-267 365,-254.5 R76.2@432.5,-254.5 488.08,-254.5 IC34.3@502.1,-240.48
  Bottom Layer w8: CN10.133@102.42,-147.64 134.5,-147.64 142.26,-139.87 288.37,-139.87 358.5,-210 358.5,-290 v1(352.5,-296)
SMI_RX3: IC32.5 RP7.1 | length 772.3
  Top Layer w6: IC32.5@576.9,12.66 616.11,-26.54 709.97,-26.54 776.5,39.99 776.5,544.16 RP7.1@789.97,557.64
  Top Layer w8: RP7.1@789.97,557.64 RP7.1@789.97,563.32
SMI_RX3_N: CN10.120 IC32.4 R75.1 | length 558.4
  Top Layer w8: v1(381.5,65) 381.5,37 389,29.5 R75.1@432.5,29.5 449.34,12.66 IC32.4@502.1,12.66
  Bottom Layer w8: CN10.120@102.42,236.22 134.5,236.22 142.26,228.46 302.84,228.46 375.5,155.8 375.5,71 v1(381.5,65)
SMI_RX3_P: CN10.121 IC32.3 R75.2 | length 556
  Top Layer w8: v1@354.5,66 v1(355.5,65) 355.5,89 359,92.5 R75.2@432.5,92.5 447.16,107.15 IC32.3@502.1,107.15
  Bottom Layer w8: CN10.121@102.42,206.69 134.5,206.69 142.26,214.46 297.04,214.46 361.5,150 361.5,71 v1(355.5,65)
SMI_RX4: IC30.5 RP6.4 | length 562
  Top Layer w6: RP6.4@964.03,565.32 964.03,453.47 v1(964.5,453)
  Top Layer w8: IC30.5@576.9,360.3 576.9,400.4 v1@579.5,403
  MidLayer1 w6: v1@579.5,403 744.5,403 794.5,453 v1(964.5,453)
  other v1: 577.5,403
SMI_RX4_N: CN10.108 IC30.4 R74.1 | length 585.6
  Top Layer w8: v1(383.5,408) 383.5,386 393,376.5 R74.1@432.5,376.5 485.9,376.5 IC30.4@502.1,360.3
  Bottom Layer w8: CN10.108@102.42,590.55 134.5,590.55 142.26,582.79 341.3,582.79 377.5,546.59 377.5,414 v1(383.5,408)
SMI_RX4_P: CN10.109 IC30.3 R74.2 | length 576.5
  Top Layer w8: v1(357.5,408) 357.5,410.28 386.71,439.5 R74.2@432.5,439.5 447.79,454.79 IC30.3@502.1,454.79
  Bottom Layer w8: CN10.109@102.42,561.02 134.5,561.02 142.26,568.79 335.5,568.79 363.5,540.79 363.5,414 v1(357.5,408)
SMI_RX5: IC28.5 RP6.3 | length 586.1
  Top Layer w6: IC28.5@576.9,707.94 577.5,707.34 v1(577.5,675) ; RP6.3@944.34,565.32 944.34,510.16 v1@951.5,503
  Top Layer w12: IC28.5@576.9,702.6 IC28.5@576.9,707.94
  MidLayer1 w6: v1(577.5,675) 597.03,675 691.5,580.53 691.5,528 732.5,487 928.5,487 v1(944.5,503)
SMI_RX5_N: CN10.96 IC28.4 R73.1 | length 583.2
  Top Layer w8: v1(366.5,768) 404,730.5 R73.1@431.5,730.5 ; 407.5,730.5 R73.1@431.5,730.5 ; IC28.4@502.1,707.94 479.53,730.5 R73.1@431.5,730.5
  Bottom Layer w8: CN10.96@102.42,944.88 134.5,944.88 142.26,937.12 292.3,937.12 360.5,868.92 360.5,774 v1(366.5,768) v1@366.5,773.8
SMI_RX5_P: CN10.97 IC28.3 R73.2 | length 570.9
  Top Layer w8: v1(340.5,768) 340.5,770.28 363.71,793.5 R73.2@431.5,793.5 ; 407.5,793.5 R73.2@431.5,793.5 ; IC28.3@502.1,802.43 493.17,793.5 R73.2@431.5,793.5
  Bottom Layer w8: CN10.97@102.42,915.35 134.5,915.35 142.26,923.12 286.5,923.12 346.5,863.12 346.5,774 v1(340.5,768)
SMI_RX6: CN11.16 CN12.16 | length 77.1
  Top Layer w6: CN12.16@1131,825.64 v1@1131,863.5
  Bottom Layer w6: v1(1130.1,864.4) 1131,863.5 CN11.16@1131,825.54
SMI_RX7: CN11.20 CN12.20 | length 121
  Top Layer w6: v1(1091.4,765.2) 1091.4,825.41 CN12.20@1091.63,825.64
  Bottom Layer w6: v1(1091.4,765.2) 1091.63,765.43 CN11.20@1091.63,825.54
SMI_TX0: CN11.7 IC37.5 | length 2334.9
  Top Layer w6: IC37.5@576.9,-856.43 613.67,-893.2 697.52,-893.2 900.44,-690.28 v1@900.44,506.94
  Top Layer w8: v1@900.44,506.94 v1(900.5,507)
  MidLayer1 w6: v1@900.64,507 900.64,505.33 900.5,505.19 v1(900.5,507) 900.5,740.97 989.53,830 1050.93,830 1134.53,913.6 1175.1,913.6 v1(1192,930.5)
  Bottom Layer w6: v1(1192,930.5) 1209.74,948.24 CN11.7@1209.74,1030.26
SMI_TX0_N: CN10.15 IC37.3 | length 457.6
  Top Layer w8: CN10.15@102.42,-826.77 144.27,-826.77 151.5,-834 262.5,-834 295.5,-801 464.5,-801 ; 473.5,-801 464.5,-801 ; IC37.3@502.1,-761.94 502.1,-789.4 490.5,-801 464.5,-801
SMI_TX0_P: CN10.14 IC37.4 | length 452.4
  Top Layer w8: CN10.14@101.42,-855.65 143.15,-855.65 143.5,-856 151.5,-848 268.3,-848 301.3,-815 473.5,-815 490.5,-815 502.1,-826.6 IC37.4@502.1,-856.43
SMI_TX1: CN11.11 IC35.5 | length 2060.8
  Top Layer w6: IC35.5@576.9,-508.79 612.37,-544.26 809.48,-544.26 847.12,-506.62 847.12,519.62 874.98,547.48 874.98,604 ; v1(859.5,681) 860.5,680 860.5,650.13 874.98,635.65 874.98,604 ; 874.98,619.04 874.98,604
  MidLayer1 w6: v1(859.5,681) 859.5,741 963.35,844.85 ; 970.5,852 963.35,844.85 ; v1(1170.5,985.1) 1170.5,964.2 1143.9,937.6 1124.59,937.6 1040.99,854 972.5,854 963.35,844.85
  Bottom Layer w6: CN11.11@1170.37,1030.26 1170.37,985.23 v1(1170.5,985.1)
SMI_TX1_N: CN10.27 IC35.3 | length 460.8
  Top Layer w8: CN10.27@102.42,-472.44 149.94,-472.44 157.5,-480 348.5,-480 375.5,-453 464.5,-453 ; 476.5,-453 464.5,-453 ; IC35.3@502.1,-414.3 502.1,-446.4 495.5,-453 464.5,-453
SMI_TX1_P: CN10.26 IC35.4 | length 461.6
  Top Layer w8: CN10.26@102.45,-502 146.5,-502 154.5,-494 354.3,-494 381.3,-467 463.5,-467 ; 476.5,-467 463.5,-467 ; IC35.4@502.1,-508.79 501.5,-508.19 501.5,-479 489.5,-467 463.5,-467
SMI_TX2: CN11.17 IC33.5 | length 1633.9
  Top Layer w6: IC33.5@576.9,-161.15 614.25,-198.5 744.94,-198.5 801.28,-142.16 v1@801.28,505.78
  MidLayer1 w6: v1@801.28,505.49 801.28,525.07 812.4,536.19 812.4,685 ; 812.4,705.05 812.4,685 ; v1(1111.1,988.4) 1111.1,958.8 1030.3,878 961.53,878 ; 812.4,685 812.4,728.87 955.01,871.49 ; 955.01,871.49 961.53,878 ; 955.01,871.49 961.53,878
  Bottom Layer w6: v1(1111.1,988.4) 1111.32,988.61 CN11.17@1111.32,1030.26
  other v1: 801.5,509
SMI_TX2_N: CN10.39 IC33.3 | length 467.1
  Top Layer w8: CN10.39@102.42,-118.11 140.61,-118.11 148.5,-126 318.5,-126 338.5,-106 461.5,-106 ; 482.5,-106 461.5,-106 ; IC33.3@502.1,-66.67 498.5,-70.26 498.5,-102 494.5,-106 461.5,-106
SMI_TX2_P: CN10.38 IC33.4 | length 471.6
  Top Layer w8: CN10.38@102.42,-147.64 144.85,-147.65 152.5,-140 324.3,-140 344.3,-120 452.5,-120 ; 481.5,-120 452.5,-120 ; IC33.4@502.1,-161.15 502.1,-136.6 485.5,-120 452.5,-120
SMI_TX3: CN11.21 IC31.5 | length 1186.9
  Top Layer w6: IC31.5@576.9,186.48 610.12,153.27 698.56,153.27 750.5,205.21 v1(750.5,581)
  MidLayer1 w6: v1@751.16,581.61 751.16,701.57 951.59,902 986.5,902 v1(1072.3,987.8)
  Bottom Layer w6: CN11.21@1071.94,1030.26 1071.94,988.16 v1(1072.3,987.8)
SMI_TX3_N: CN10.51 IC31.3 | length 437.3
  Top Layer w8: CN10.51@103.42,236.88 149.62,236.88 158.5,228 337.5,228 350.5,241 484.1,241 502.1,259 IC31.3@502.1,280.97 ; 144.38,236.88 144.5,237
SMI_TX3_P: CN10.50 IC31.4 | length 483.5
  Top Layer w8: CN10.50@102.42,206.69 151.19,206.69 158.5,214 343.3,214 356.3,227 489.5,227 502.1,214.4 IC31.4@502.1,186.48 ; CN10.50@103.42,207.35 145.15,207.35 145.5,207
SMI_TX4: CN11.8 IC29.5 | length 1052.4
  Top Layer w6: IC29.5@576.9,534.12 576.9,499.6 v1(577.5,499)
  Top Layer w8: IC29.5@576.9,533.13 IC29.5@576.9,534.12
  MidLayer1 w6: v1(577.5,499) 602.08,474.42 781.5,474.42 ; 907.59,474.42 781.5,474.42 ; 1119.5,650.42 1082.49,613.41 ; v1(1186.7,755.6) 1186.7,717.62 1082.49,613.41 ; 781.5,474.42 943.5,474.42 1082.49,613.41
  Bottom Layer w6: v1(1186.7,755.6) 1209.74,778.64 CN11.8@1209.74,825.54
SMI_TX4_N: CN10.63 IC29.3 | length 482.7
  Top Layer w8: CN10.63@102.42,590.55 149.95,590.55 157.5,583 490.5,583 498.5,591 498.5,625.01 IC29.3@502.1,628.61 ; CN10.63@105.42,590.88 146.38,590.88 146.5,591
SMI_TX4_P: CN10.62 IC29.4 | length 434.3
  Top Layer w8: CN10.62@105.42,561.35 147.15,561.35 ; 147.5,561 147.15,561.35 ; 470.5,569 463.5,569 ; IC29.4@502.1,534.12 502.1,555.4 488.5,569 463.5,569 ; 147.15,561.35 149.85,561.35 157.5,569 463.5,569
SMI_TX5: CN11.12 IC27.5 | length 728.2
  Top Layer w6: IC27.5@576.9,875.67 605.94,846.64 820.18,846.64 945.81,721 1089.1,721 v1(1139,770.9)
  Top Layer w8: IC27.5@576.9,875.67 IC27.5@576.9,881.76
  Bottom Layer w6: v1@1139,772.58 v1(1139,770.9) 1149.2,770.9 1170.37,792.07 CN11.12@1170.37,825.54
SMI_TX5_N: CN10.75 IC27.3 | length 450.1
  Top Layer w8: CN10.75@102.42,944.88 146.62,944.88 152.5,939 458.5,939 ; 475.5,939 458.5,939 ; IC27.3@502.1,976.24 497.5,971.64 497.5,945 491.5,939 458.5,939
SMI_TX5_P: CN10.74 IC27.4 | length 503.3
  Top Layer w8: CN10.74@102.42,915.35 144.15,915.35 153.79,925 413.5,925 ; 475.5,925 413.5,925 ; IC27.4@502.1,881.76 502.1,915.4 492.5,925 413.5,925
SMI_TX6: CN11.18 CN12.18 | length 76.1
  Top Layer w6: v1(1110.7,787.8) 1111.32,788.41 CN12.18@1111.32,825.64
  Bottom Layer w6: v1(1110.7,787.8) 1111.32,788.41 CN11.18@1111.32,825.54
SMI_TX7: CN11.22 CN12.22 | length 161.4
  Top Layer w6: v1(1071.2,745.2) 1071.94,745.94 CN12.22@1071.94,825.64
  Bottom Layer w6: v1(1071.2,745.2) 1071.8,745.8 1071.8,825.39 CN11.22@1071.94,825.54
TX_CLK1: IC23_U1.14 R96.2 R97.2 | length 259.1
  Top Layer w6: R97.2@3623.5,-392.72 3624.22,-392 3647.5,-392 3658.22,-402.72 R96.2@3658.22,-430 3781.5,-430 3808.83,-402.67 IC23_U1.14@3808.83,-372.27
UP0_DETECT: CN1.30 CN8_SFP0.6 RP4_SFP0.6 | length 2288.1
  Top Layer w6: RP4_SFP0.6@5703.19,22.16 5751.34,22.16 v2(5752.5,21)
  MidLayer1 w6: v2(4570.5,-1175) 4589.58,-1155.92 4589.58,-1108.75 4968.39,-729.94 5042.53,-729.94 5327.97,-444.5 5733.97,-444.5 5824.5,-353.97 5824.5,-210 5778.26,-163.76 5778.26,-4.76 v2(5752.5,21)
  Bottom Layer w6: CN8_SFP0.6@5606.92,35.77 5740.73,35.77 5749.5,27 v2@5751.5,27
  Bottom Layer w12: CN1.30@4571.71,-1238.58 v2@4571.71,-1175
UP0_ENABLE: CN3.43 IC5.132 IC23_U0.1 | length 2775.6
  Top Layer w6: IC5.132@3425.85,714.27 3596.77,714.27 v1(3621.5,739) ; IC23_U0.1@4274.23,-166.56 v1(4274.23,-143.27) v1@4274.5,-143
  MidLayer1 w6: v1(3588.5,-777) 3597.5,-786 3872.91,-786 4118.5,-540.41 4118.5,-212.13 4187.36,-143.27 ; v1(3728.5,480) 3728.5,461 4187.36,2.14 4187.36,-143.27 ; v1(4274.23,-143.27) 4187.36,-143.27
  Bottom Layer w6: 3570.5,-952 3581.5,-941 ; 3574.07,-952 CN3.43@3574.07,-1033.86 CN3.43@3576.5,-1031.43 ; 3574.07,-951.57 3581.5,-944.15 3581.5,-941 ; v1(3588.5,-777) 3588.5,-934 3581.5,-941 ; v1(3621.5,739) 3689.5,671 3689.5,519 v1(3728.5,480)
UP0_LOOPEN: CN3.47 IC23_U0.15 | length 1272.2
  Top Layer w6: v1(4381.5,-422) IC23_U0.15@4381.52,-372.27 4381.52,-398.02
  MidLayer1 w6: v1(3718.5,-991) 3744.37,-991 ; 3744.4,-991.03 3899.34,-991.03 3995.5,-894.87 3995.5,-850.09 4122.46,-723.13 4122.59,-723.13 4133.72,-712 4288.56,-712 4386.5,-614.06 4386.5,-492 4381.5,-487 v1(4381.5,-422)
  Bottom Layer w6: CN3.47@3637.07,-1033.86 3637.07,-974.43 3642.5,-969 3696.5,-969 v1(3718.5,-991)